# EAGLE board redboard_machine (EAGLE 7.6.0)

No outline drawn. Coordinates in mm, seen from the top.
Copper layers (1*16): Top 0.035mm / dielectric 1.5mm / Bottom 0.035mm
Design rules "default": minimum track width 10mil, minimum drill 24mil, track to track 8mil, track to pad 8mil, pad to pad 8mil, via to via 8mil, smd to smd 8mil, copper to edge 40mil, drill to drill 8mil, minimum pad ring 10mil, minimum via ring 8mil, stop-mask expansion 4mil, vias tented up to drill 0mil, thermal gap 10mil

## Placement (x,y rotation side)
E$1  [UARM]  152.4,241.3 315 top
E$2  [CARTRIDGE_X4]  50.8,12.7 0 top
E$3  [CARTRIDGE_X4]  38.1,508 0 top
E$6  [UARM]  152.4,406.4 45 top

## Library data of the parts
E$1-E$3 E$6 = sandbox